# Altium PCB OpenBLC.PcbDoc
Units mm, origin at the board's own origin, x right, y up, seen from the top; angles counter-clockwise.
Board outline 47.75 x 25.5 mm, 2 copper layers (Top Layer, Bottom Layer); 40 components, 23 nets, 133 pads, 214 vias.
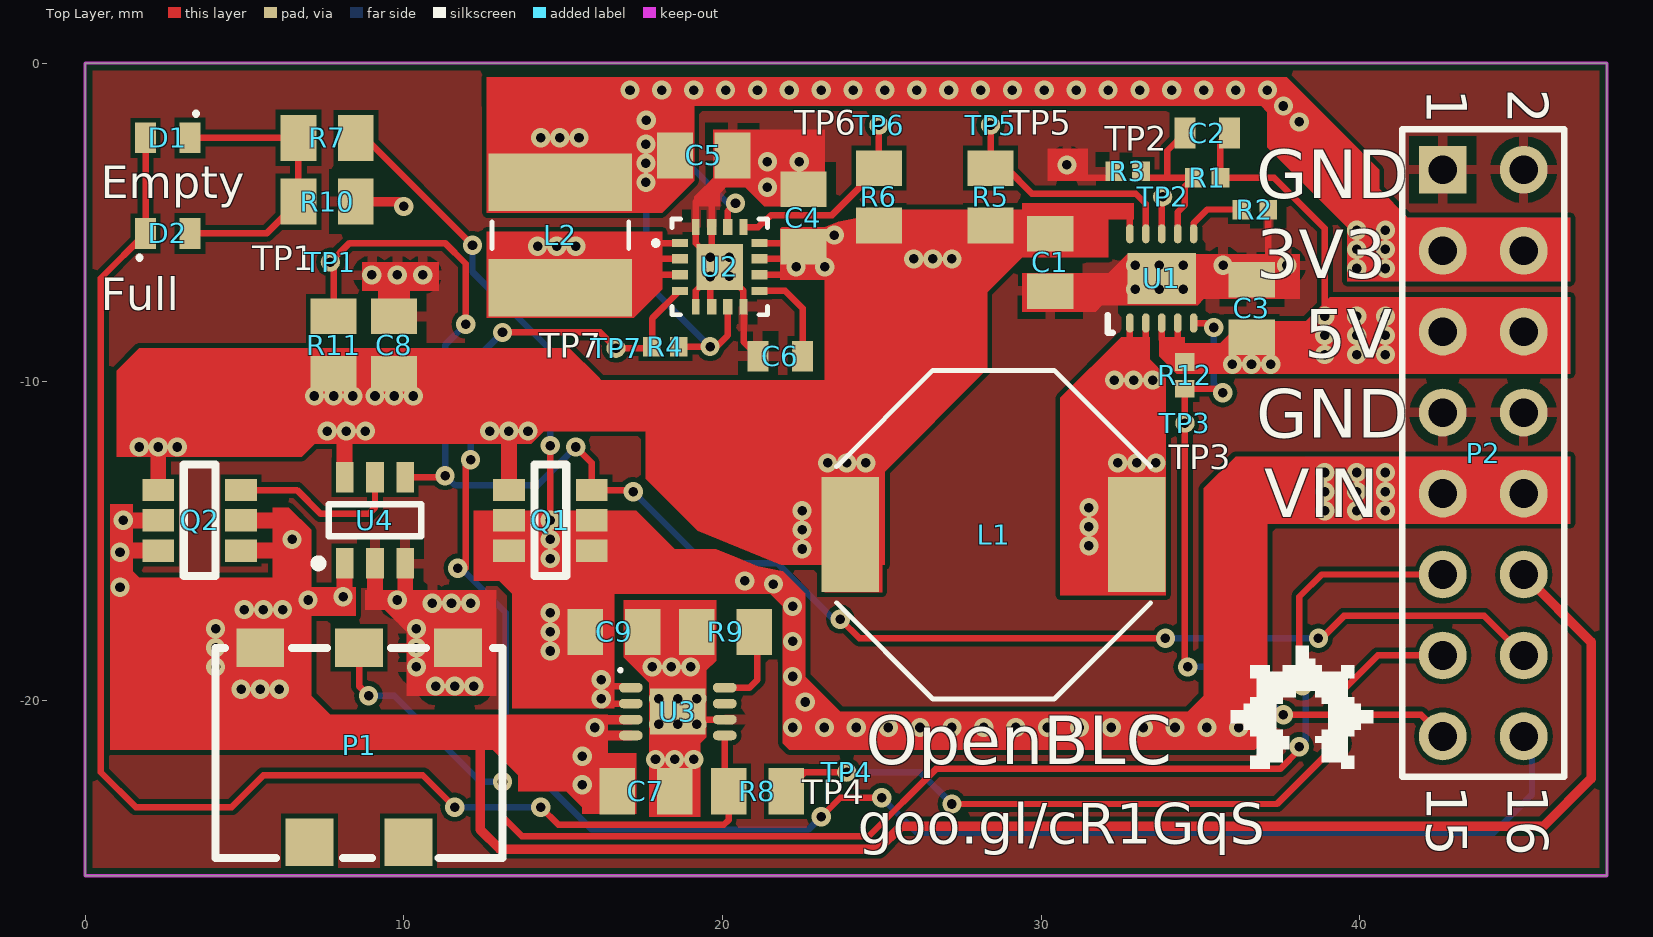
[diagram p0: Top Layer view]
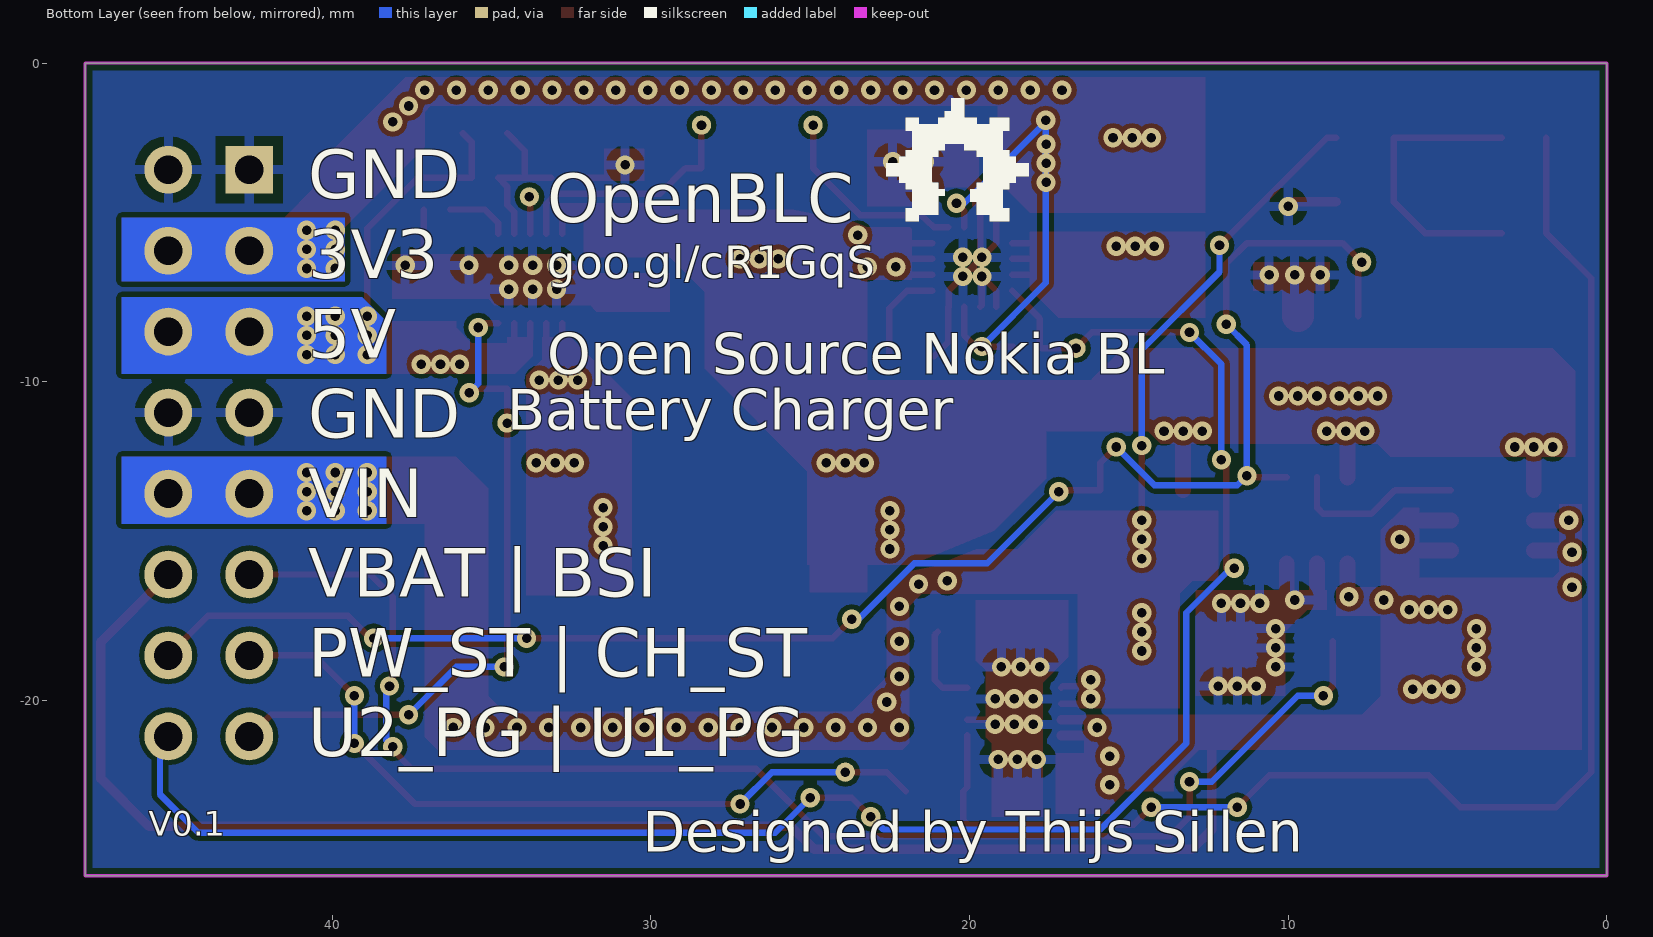
[diagram p1: Bottom Layer view, seen from below]
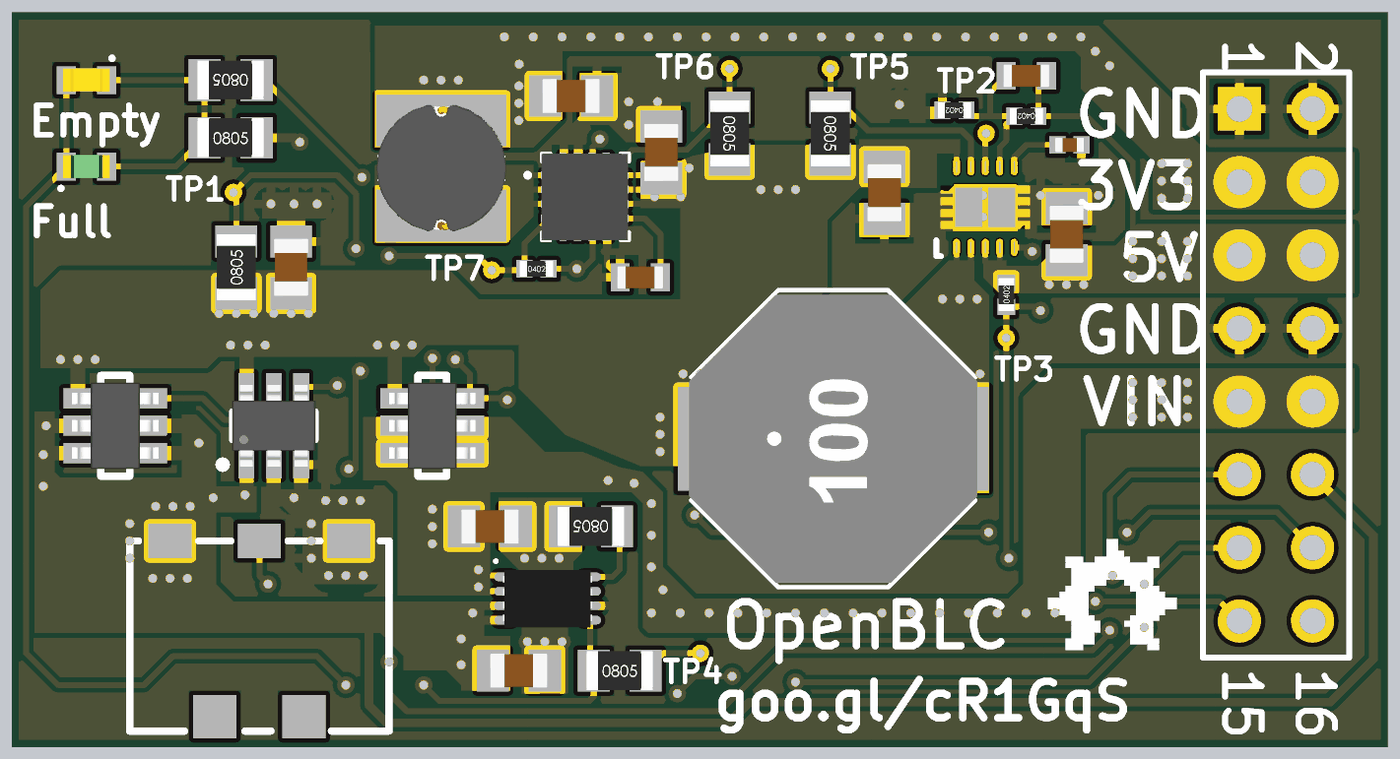
[diagram p2: 3D render of the assembled board from above, using the file's embedded part models]

## Layer stack, top to bottom
Top Solder: solder mask 0.0102, Solder Resist, Dk 3.5
Top Layer: signal copper 0.0356
Dielectric 1: dielectric 0.32, FR-4, Dk 4.8
Bottom Layer: signal copper 0.0356
Bottom Solder: solder mask 0.0102, Solder Resist, Dk 3.5

## Board outline
0,-25.5 47.75,-25.5 47.75,0 0,0

## Design rules (kind name [scope] priority, off if disabled: settings)
Clearance [All] p1: gap=0.152
ComponentClearance [All] p1 off: gap=0.254 collisioncheckmode=3 verticalgap=0.254 showdistances=FALSE
Height [All] p1 off: minheight=0 maxheight=25.4 prefheight=12.7
HoleSize [All] p1: absolutevalues=TRUE maxlimit=6.3 minlimit=0.3 maxpercent=80.000 minpercent=20.000
HoleToHoleClearance [All] p1: gap=0.45 allowstackedmicrovias=TRUE
MinimumSolderMaskSliver [All] p1: minsoldermaskwidth=0.152
PlaneConnect [All] p1: planeconnectstyle=Relief reliefexpansion=0.3 reliefentries=4 reliefconductorwidth=0.3 reliefairgap=0.3
PolygonConnect [All] p1: connectstyle=Relief reliefconductorwidth=0.3 reliefentries=4 polygonreliefangle="90 Angle" airgapwidth=0.3
RoutingCorners [All] p1: cornerstyle=45-Degree minsetback=0.152 maxsetback=0.203
RoutingVias [All] p1: holewidth=0.3 width=10 viastyle="Through Hole" minholewidth=0.3 minwidth=0.604 maxholewidth=6.3 maxwidth=0.604
SilkToSilkClearance [All] p1: silktosilkclearance=0.152
SilkToSolderMaskClearance [IsPad] p1: minsilkscreentomaskgap=0.152 clearancetoexposedcopper=TRUE
SolderMaskExpansion [All] p1: expansion=0.152
UnpouredPolygon [All] p1: allowunpoured=FALSE
Width [All] p1: maxlimit=10 minlimit=0.152 preferedwidth=0.203
20 further rules are at their usual default settings.

## Classes and differential pairs
component class OpenBLC_MCP73831: C7 C9 D1 D2 R7 R8 R9 R10 TP4 U3
component class OpenBLC_LTC4412: C8 Q1 Q2 R11 TP1 U4
component class OpenBLC_TPS62152: C4 C5 C6 L2 R4 R6 TP6 TP7 U2
component class OpenBLC_TPS61230: C1 C2 C3 L1 R1 R2 R3 R5 R12 TP2 TP3 TP5 U1
component class OpenBLC_CONNECTIONS: P1 P2

## Components (designator, comment, footprint, x,y, rotation, side; value= is the part's Value field where it differs from the comment)
C1 "C2012X5R0J226M125AC" 0805_CAP 30.283,-6.257 r270 top
C2 "C0603C180J5GACTU" 0603_CAP 35.205,-2.197 r180 top
C3 "GRM21BR61A106KE19L" 0805_CAP 36.605,-7.697 r90 top
C4 "GRM21BR61A106KE19L" 0805_CAP 22.538,-4.858 r90 top
C5 "C2012X5R0J226M125AC" 0805_CAP 19.411,-2.897 r0 top
C6 "GRM033R71C391KA01D" 0603_CAP 21.811,-9.197 r180 top
C7 "GRM21BR61A106KE19L" 0805_CAP 17.598,-22.848 r0 top
C8 "C2012X5R0J226M125AC" 0805_CAP 9.698,-8.848 r90 top
C9 "0805_CAP" 0805_CAP 16.598,-17.848 r0 top
D1 "0603LED_YE" "0603 _DIODE_YE" 2.598,-2.348 r0 top
D2 "0603LED_GR" "0603 _DIODE_GR" 2.598,-5.348 r180 top
L1 "SRU1028-1R0Y" SRU1028 28.505,-14.797 r180 top
L2 "SDR0403-2R2ML" SDR0403 14.911,-5.397 r270 top
P1 "Nokia 3pin pogo connector" Nokia_3P_batt_conn 8.598,-18.348 r0 top
P2 "Header 8X2" HDR2X8 42.598,-3.348 r270 top
Q1 "FDC638P" FDC638P 14.598,-14.348 r90 top
Q2 "FDC638P" FDC638P 3.598,-14.348 r90 top
R1 "CRCW0402402KFKED" 0402_RES 35.205,-3.597 r180 top
R2 "GRM155R71C153KA01D" 0402_CAP 36.705,-4.597 r0 top
R3 "CRCW0402100KFKEDHP" 0402_RES 32.709,-3.397 r180 top
R4 "CRCW0402100KFKEDHP" 0402_RES 18.211,-8.897 r0 top
R5 "0805_RES" 0805_RES 28.409,-4.197 r270 top
R6 "0805_RES" 0805_RES 24.909,-4.197 r270 top
R7 "0805_RES" 0805_RES 7.598,-2.348 r180 top
R8 "0805_RES" 0805_RES 21.098,-22.848 r0 top
R9 "0805_RES" 0805_RES 20.098,-17.848 r180 top
R10 "0805_RES" 0805_RES 7.598,-4.348 r0 top
R11 "0805_RES" 0805_RES 7.798,-8.848 r90 top
R12 "CRCW0402100KFKEDHP" 0402_RES 34.509,-9.797 r90 top
TP1 "U4_STAT" Via_TP 7.698,-6.248 r0 top
TP2 "U1_HYS" Via_TP 33.809,-4.197 r0 top
TP3 "U1_PG" Via_TP 34.509,-11.297 r0 top
TP4 "TESTPOINT" Via_TP 23.898,-22.248 r0 top
TP5 "U1_EN" Via_TP 28.409,-1.947 r0 top
TP6 "U2_EN" Via_TP 24.909,-1.947 r0 top
TP7 "U2_PG" Via_TP 16.659,-8.947 r0 top
U1 "TPS61230DRCT" TPS61230DRCR 33.783,-6.757 r90 top
U2 "TPS62152RGTT" TPS62152RGTR 19.911,-6.397 r0 top
U3 "MCP73831-2ATI/MC" PQFN50P300X200X5_HS-9N 18.598,-20.348 r0 top
U4 "LTC4412ES6#TRMPBF" SOT95P280X110-6N 9.098,-14.348 r90 top

## Footprints (in the part's own frame and the unit in brackets; to place one, negate y for a bottom-side part, rotate by r counter-clockwise, add the part's x,y. Pads: shape width x height; smd on the part's side, far side on the other; paste and mask are expansions set on the pad)
0402_CAP [mil]
  rect 22x24 smd: 1(-16.5,0) 2(16.5,0)
  body extent -20,-10 20,10, height 20
0402_RES [mil]
  rect 22x24 smd: 1(-16.5,0) 2(16.5,0)
  body extent -23,-11 23,11, height 16
"0603 _DIODE_GR" [mil]
  rect 26x38 smd: 1(-27.5,0) 2(27.5,0)
  silkscreen extent 35,30 35,30, body extent -32,-16 32,16, height 43
"0603 _DIODE_YE" [mil]
  rect 26x38 smd: 1(-27.5,0) 2(27.5,0)
  silkscreen extent 35,30 35,30, body extent -32,-16 32,16, height 43
0603_CAP [mil]
  rect 26x38 smd: 1(-27.5,0) 2(27.5,0)
  body extent -31,-16 31,16, height 24
0805_CAP [mil]
  rect 44x57 smd: 1(-35.5,0) 2(35.5,0)
  body extent -39,-24 39,24, height 37
0805_RES [mil]
  rect 44x57 smd: 1(-35.5,0) 2(35.5,0)
  body extent -45,-27 45,27, height 30
FDC638P [mm]
  rect 0.7x1 smd: 1(-0.95,-1.3) 1(-0.95,1.3) 1(0,1.3) 1(0,-1.3) 2(0.95,-1.3) 3(0.95,1.3)
  silkscreen extent -1.75,-0.5 1.75,0.5, body extent -1.5,-1.5 1.5,1.5, height 1.05
HDR2X8 [mm] "Connector; Header; 8x2 Position"
  rect 1.5x1.5 hole 0.9: 1(0,0)
  round 1.5 hole 0.9: 2(0,2.54) 3(2.54,0) 4(2.54,2.54) 5(5.08,0) 6(5.08,2.54) 7(7.62,0) 8(7.62,2.54) 9(10.16,0) 10(10.16,2.54) 11(12.7,0) 12(12.7,2.54) 13(15.24,0) 14(15.24,2.54) 15(17.78,0) 16(17.78,2.54)
  silkscreen extent -1.27,-1.27 19.05,3.81
Nokia_3P_batt_conn [mm]
  rect 1.5x1.2 smd: 1(-3.1,0) 2(0,0) 3(3.1,0)
  rect 1.5x1.5 smd: 4(-1.55,-6.1) 4(1.55,-6.1)
  silkscreen extent -4.5,-6.6 4.5,0, body extent -4.63,-6.73 4.63,0.13, height 4.3
PQFN50P300X200X5_HS-9N [mm] "PQFN, 8-Leads, Body 3.00x2.00mm, Pitch 0.50mm, Thermal Pad 1.75x1.45mm, IPC Medium Density"
  oval 0.75x0.3 smd: 1(-1.475,0.75) 2(-1.475,0.25) 3(-1.475,-0.25) 4(-1.475,-0.75) 5(1.475,-0.75) 6(1.475,-0.25) 7(1.475,0.25) 8(1.475,0.75)
  rect 1.75x1.45 smd: 9(0,0)
  silkscreen extent -1.85,1.25 -1.75,1.35, body extent -1.55,-1 1.55,1, height 0.85
SDR0403 [mil]
  rect 71x177 smd: 1(-65,0) 2(65,0)
  silkscreen extent -16,-84 16,84, body extent -87,-89 87,89, height 128
SOT95P280X110-6N [mm] "SOT23, 6-Leads, Body 2.90x2.80mm, Pitch 0.95mm, IPC Medium Density"
  rect 0.95x0.55 smd: 1(-1.35,0.95) 2(-1.35,0) 3(-1.35,-0.95) 4(1.35,-0.95) 5(1.35,0) 6(1.35,0.95)
  silkscreen extent -1.47,-1.45 0.5,1.9, body extent -1.41,-1.45 1.41,1.45, height 1
SRU1028 [mil]
  rect 71x142 smd: 1(-177,0) 2(177,0)
  silkscreen extent -194,-203 194,203, body extent -197,-197 197,197, height 198
TPS61230DRCR [mm]
  oval 0.6x0.24 smd paste-0.102 mask+0.051: 1(-1.4,1) 2(-1.4,0.5) 3(-1.4,0) 4(-1.4,-0.5) 5(-1.4,-1) 6(1.4,-1) 7(1.4,-0.5) 8(1.4,0) 9(1.4,0.5) 10(1.4,1)
  rect 1.6x2.15 smd paste-0.825 mask+0.051: 11(0,0)
  silkscreen extent -1.7,1.54 -1.15,1.7, body extent -1.6,-1.6 1.6,1.6, height 1
TPS62152RGTR [mm]
  rect 0.5x0.25 smd: 1(-1.25,0.75) 4(-1.25,-0.75) 9(1.25,-0.75) 12(1.25,0.75)
  rect 0.5x0.3 smd: 2(-1.25,0.25) 3(-1.25,-0.25) 10(1.25,-0.25) 11(1.25,0.25)
  rect 0.25x0.5 smd: 5(-0.75,-1.25) 8(0.75,-1.25) 13(0.75,1.25) 16(-0.75,1.25)
  rect 0.3x0.5 smd: 6(-0.25,-1.25) 7(0.25,-1.25) 14(0.25,1.25) 15(-0.25,1.25)
  rect 1.45x1.45 smd paste-0.837: 17(0,0)
  silkscreen extent -2.08,-1.5 1.5,1.5, body extent -1.55,-1.52 1.49,1.52, height 0.9
Via_TP [mm]
  round 0.604 hole 0.3: 1(0,0)

## Part data
C1 C5 C8: "CAP CER 22UF 6.3V 20% X5R 0805"
C2: "Meerlaagse keramische condensatoren MLCC - SMD/SMT 50volts 18pF C0G 5%"
C3 C4 C7: "MURATA - GRM21BR61A106KE19L - CAPACITOR, CERA, 10UF, 10%, 10V, 10%, SMD"
C6: "Meerlaagse keramische condensatoren MLCC - SMD/SMT 390pF 16 volts 10%"
L1: "Vaste smoorspoelen 1uH 30% SMD 1028"
L2: "Vaste smoorspoelen 2.2uH 20% SMD 0403"
P1: library part Nokia_3PIN_BATT_CONTACT
P2: "Header, 8-Pin, Dual row"
Q1 Q2: "MOSFET SSOT-6 P-CH -20V"
R1: "VISHAY DRALORIC - CRCW0402402KFKED - RESISTOR, 0402, 402K, 1%"
R2: "Meerlaagse keramische condensatoren MLCC - SMD/SMT 0402 0.015uF 16volts X7R 10%"
R3 R4 R12: "VISHAY DRALORIC - CRCW0402100KFKEDHP - RESISTOR, POWER, 100K, 0.125W, 1%"
TP1 TP2 TP3 TP5 TP6 TP7: library part TESTPOINT, "TESTPOINT SCOPE GRABBER"
TP4: "TESTPOINT SCOPE GRABBER"
U3: "Batterijbeheer Li-Ion/Li-Poly Charg Mgnt 4.2V Vreg out"
U4: "IC OR CTRLR SRC SELECT TSOT23-6"

## Via types
v1: diameter 0.604, hole 0.3, Top Layer to Bottom Layer, tented both sides, 214 vias

## Nets (pads, with @x,y where several pads share a name; then routed paths per layer and width w, separated by ;. In a path a pad name is that pad's centre, name@x,y a point inside that pad or via, vN(x,y) a via of type N, cw(c..) or ccw(c..) an arc to the next point about the centre after c; other vN are vias at no path point)
3.3VDC: C5.1 L2.1 P2.3 P2.4 R4.2 U2.7 U2.14 | length 15.2
  Top Layer w0.203: R4.2 v1(19.611,-8.897) 19.811,-8.897 20.161,-8.547 U2.7 ; U2.14 20.161,-4.646 20.257,-4.55 v1(20.409,-4.398)
  Bottom Layer w0.203: v1(17.611,-1.797) v1@17.611,-1.847 ; v1(19.611,-8.897) 17.611,-6.897 v1@17.611,-1.847 ; v1(20.409,-4.398) 20.161,-4.398 v1@17.611,-1.847
  other v1: 39.898,-6.448 40.798,-6.448 39.898,-5.848 40.798,-5.848 39.898,-5.248 40.798,-5.248 17.598,-3.748 17.598,-3.148 17.598,-2.548 14.298,-2.348 14.898,-2.348 15.498,-2.348 38.098,-1.848 37.598,-1.348 17.098,-0.848 18.098,-0.848 19.098,-0.848 20.098,-0.848 21.098,-0.848 22.098,-0.848 23.098,-0.848 24.098,-0.848 25.098,-0.848 26.098,-0.848 27.098,-0.848 28.098,-0.848 29.098,-0.848 30.098,-0.848 31.098,-0.848 32.098,-0.848 33.098,-0.848 34.098,-0.848 35.098,-0.848 36.098,-0.848 37.098,-0.848
5VDC: C2.1 C3.1 P2.5 P2.6 R1.1 R12.2 U1.3 U1.4 | length 11
  Top Layer w0.203: U1.3 33.783,-8.671 33.909,-8.797 ; U1.4 34.283,-8.871 34.309,-8.897 ; C2.1 35.624,-2.477 R1.1 37.305,-3.597 38.505,-4.797 38.898,-5.19 v1(38.898,-7.948) ; C3.1@36.605,-8.396 37.907,-8.396
  other v1: 35.998,-9.448 36.598,-9.448 37.198,-9.448 38.898,-9.148 39.898,-9.148 40.798,-9.148 38.898,-8.548 39.898,-8.548 40.798,-8.548 39.898,-7.948 40.798,-7.948
GND: C1.2 C3.2 C4.2 C5.2 C6.2 C7.2 C8.2 C9.2 P1.3 P2.1 P2.2 P2.7 P2.8 R2.2 R3.2 R9.2 R10.2 U1.11 U2.5 U2.6 U2.8 U2.15 U2.16 U2.17 U3.6 U3.9 U4.2 U4.3 | length 28.8
  Top Layer w0.203: P1.3 P1.3@11.798,-18.248 ; C9.2 18.598,-18.946 U3.9 ; C7.2 18.499,-20.446 U3.9 ; U2.5 19.165,-7.643 19.165,-7.143 U2.17 ; R9.2 19.196,-19.749 U3.9 ; 19.309,-4.197 19.161,-4.346 U2.16 19.165,-5.151 19.165,-5.651 U2.17@19.661,-6.147 ; 19.609,-4.297 19.661,-4.349 U2.15 U2.17@19.661,-6.147 ; v1(19.611,-6.697) 19.611,-7.597 U2.6 ; U3.6 18.848,-20.598 U3.9 ; C6.2 20.661,-8.746 U2.8 20.657,-7.643 20.657,-7.143 U2.17 ; v1@31.105,-3.197 v1(30.805,-3.197) 31.205,-3.597 R3.2@32.286,-3.597 ; C3.2@37.105,-6.297 37.124,-6.278 R2.2 ; U2.17@19.661,-6.147 U2.17
  Top Layer w0.3: R10.2 9.848,-4.348 v1(10,-4.5)
  Top Layer w0.5: U4.2 9.098,-16.648 9.298,-16.848 ; v1@9.998,-16.948 10.048,-16.898 U4.3
  Top Layer w1: C8.2 9.698,-7.148
  other v1: 17.898,-21.848 18.498,-21.848 19.098,-21.848 17.998,-20.748 18.598,-20.748 19.198,-20.748 17.998,-19.948 18.598,-19.948 19.198,-19.948 10.998,-19.548 11.598,-19.548 12.198,-19.548 10.398,-18.948 17.798,-18.948 18.398,-18.948 18.998,-18.948 10.398,-18.348 10.398,-17.748 10.898,-16.948 11.498,-16.948 12.098,-16.948 9.798,-16.848 32.955,-7.097 33.705,-7.097 34.455,-7.097 20.209,-6.696 8.998,-6.648 9.798,-6.648 10.598,-6.648 32.955,-6.347 33.705,-6.347 34.455,-6.347 35.705,-6.347 37.705,-6.347 19.609,-6.097 20.209,-6.097 21.411,-3.897 21.411,-3.097 22.411,-3.097
NetC2_2: C2.2 R1.2 R3.1 U1.7 | length 5.3
  Top Layer w0.2: R3.1@33.124,-3.597 33.709,-3.597 ; U1.7 34.283,-4.675
  Top Layer w0.203: 33.709,-3.597 33.955,-3.597 ; 34.283,-4.675 34.509,-4.448 34.509,-3.874 R1.2 33.955,-3.597 ; C2.2 33.955,-2.749 33.955,-3.597
NetC6_1: C6.1 U2.9 | length 3.1
  Top Layer w0.203: U2.9 21.161,-7.151 21.965,-7.151 22.511,-7.697 22.511,-9.196 C6.1
NetD1_1: D1.1 D2.2 R8.1 U3.5 | length 44.5
  Top Layer w0.203: D1.1 D2.2 0.498,-6.749 0.498,-22.248 1.598,-23.348 4.598,-23.348 5.598,-22.348 10.598,-22.348 v1(11.598,-23.348) ; v1(14.298,-23.348) 14.852,-23.902 20.044,-23.902 20.196,-23.749 R8.1 20.073,-22.724 U3.5
  Bottom Layer w0.203: v1(11.598,-23.348) v1(14.298,-23.348)
NetD1_2: D1.2 D2.1 R7.2 R10.1 | length 9.2
  Top Layer w0.203: D2.1 5.696,-5.348 R10.1 R7.2 D1.2
NetL1_1: L1.1 U1.1 U1.2 | length 1.3
  Top Layer w0.203: U1.1 32.783,-8.771 32.809,-8.797 ; 33.209,-8.797 33.283,-8.724 U1.2
  other v1: 31.498,-15.148 31.498,-14.548 31.498,-13.948 32.398,-12.548 32.998,-12.548 33.598,-12.548 32.298,-9.948 32.898,-9.948 33.498,-9.948
NetL2_2: L2.2 U2.1 U2.2 U2.3 | length 10.5
  Top Layer w0.203: L2.2 L2.2@15.312,-6.647 ; U2.3 L2.2@15.312,-6.647 ; U2.2 L2.2@15.812,-6.147 ; U2.1 16.312,-5.647 L2.2@15.812,-6.147 ; L2.2@15.312,-6.647 L2.2@15.812,-6.147
  other v1: 14.198,-5.748 14.798,-5.748 15.398,-5.748
NetP1_2: P1.2 P2.11 | length 44.4
  Top Layer w0.203: P1.2@8.598,-18.148 P1.2 8.598,-19.548 v1(8.898,-19.848) ; v1(13.098,-22.548) 13.098,-23.648 13.707,-24.257 24.588,-24.257 26.698,-22.148 37.498,-22.148 38.098,-21.548 v1(38.098,-21.448) ; v1(38.197,-19.548) 38.098,-19.448 38.098,-16.748 38.798,-16.048 P2.11
  Bottom Layer w0.203: v1(8.898,-19.848) 9.698,-19.848 12.398,-22.548 v1(13.098,-22.548) ; v1(38.098,-21.448) 38.298,-21.248 38.298,-19.648 v1(38.197,-19.548)
NetP2_13: P2.13 R8.2 TP4.1 | length 24.1
  Top Layer w0.203: R8.2 22.599,-22.248 TP4.1 ; v1(27.198,-23.248) 37.398,-23.248 v1(39.298,-21.348) ; v1(39.298,-19.848) 40.558,-18.588 P2.13
  Bottom Layer w0.203: TP4.1 26.198,-22.248 v1(27.198,-23.248) ; v1(39.298,-21.348) v1(39.298,-19.848)
NetP2_14: P2.14 Q1.2 R11.2 TP1.1 U4.4 | length 53.1
  Top Layer w0.203: R11.2 7.798,-6.348 TP1.1 8.298,-5.648 11.298,-5.648 11.948,-6.298 v1(11.948,-8.198) ; U4.4 11.248,-12.998 v1(11.298,-12.948) ; v1(15.398,-12.048) 15.898,-12.548 Q1.2 17.148,-13.398 v1(17.198,-13.448) ; v1(23.698,-17.448) 24.298,-18.048 v1(33.898,-18.048) ; v1(38.697,-18.048) 38.697,-18.148 39.498,-17.348 43.898,-17.348 P2.14
  Bottom Layer w0.203: v1(11.948,-8.198) 11.298,-8.848 v1(11.298,-12.948) 11.598,-13.248 14.198,-13.248 v1(15.398,-12.048) ; v1(17.198,-13.448) 19.442,-15.692 21.728,-15.692 23.484,-17.448 v1(23.698,-17.448) ; v1(33.898,-18.048) v1(38.697,-18.048)
NetP2_15: P2.15 R12.1 TP3.1 U1.5 | length 21.5
  Top Layer w0.203: v1(34.598,-18.948) 34.509,-18.859 TP3.1 R12.1 35.567,-10.217 v1(35.698,-10.348) ; U1.5 v1@35.169,-8.157 ; v1(37.598,-20.448) 41.918,-20.448 P2.15
  Bottom Layer w0.203: v1(34.598,-18.948) 36.098,-18.948 v1(37.598,-20.448) ; v1(35.409,-8.298) 35.409,-10.059 v1(35.698,-10.348)
NetP2_16: P2.16 R4.1 TP7.1 U2.4 | length 57.9
  Top Layer w0.203: v1(11.697,-15.848) 11.943,-15.848 11.944,-12.602 v1(12.098,-12.448) ; v1(13.098,-8.452) 13.102,-8.448 16.159,-8.448 TP7.1 17.742,-8.947 R4.1 17.792,-8.017 U2.4 ; v1(23.097,-23.648) 23.697,-23.048 v1(24.998,-23.048)
  Bottom Layer w0.203: v1(11.697,-15.848) 11.797,-15.948 11.898,-15.948 13.198,-17.248 13.198,-21.348 15.898,-24.048 22.697,-24.048 v1(23.097,-23.648) ; v1(12.098,-12.448) 12.098,-9.452 v1(13.098,-8.452) ; v1(24.998,-23.048) 26.098,-24.148 44.198,-24.148 45.398,-22.948 45.398,-21.388 P2.16
NetQ2_2: Q2.2 U4.5 | length 5.5
  Top Layer w0.203: Q2.2 6.648,-13.398 7.398,-14.148 8.898,-14.148 9.098,-13.948 U4.5
NetR2_1: R2.1 U1.6 | length 2
  Top Layer w0.2: U1.6 34.783,-5.02 35.205,-4.597 R2.1
NetR5_1: R5.1 TP5.1 U1.9 | length 7.6
  Top Layer w0.203: TP5.1 R5.1 28.908,-3.296 29.709,-4.097 32.969,-4.097 33.283,-4.412 U1.9
NetR6_1: R6.1 TP6.1 U2.13 | length 6.4
  Top Layer w0.203: U2.13 21.121,-5.147 21.534,-4.769 23.436,-4.769 R6.1 TP6.1
NetR9_1: R9.1 U3.8 | length 2.7
  Top Layer w0.203: U3.8 20.848,-19.598 21.098,-19.348 21.098,-17.946 R9.1
NetTP2_1: TP2.1 U1.8 | length 1.2
  Top Layer w0.203: U1.8 33.783,-4.224 TP2.1
VBAT: C7.1 P1.1 P2.12 Q2.1 U3.3 U3.4 U4.1 | length 56.5
  Top Layer w0.203: C7.1@16.498,-22.649 C7.1
  Top Layer w0.3: 12.398,-21.248 12.398,-24.048 13.011,-24.661 24.884,-24.661 25.598,-23.948 45.75,-23.948 47.25,-22.448 47.25,-18.16 P2.12 ; 15.498,-21.148 15.548,-21.098 U3.4 ; 15.698,-20.648 15.748,-20.598 U3.3
  Top Layer w0.5: v1@1.102,-15.348 1.152,-15.298 Q2.1@2.298,-15.298 ; v1(1.198,-14.348) Q2.1@2.298,-14.348 ; Q2.1@4.898,-15.298 6.448,-15.298 ; Q2.1@4.898,-14.348 6.198,-14.348 v1@6.498,-14.648 ; v1@6.498,-15.248 6.448,-15.298 ; 6.847,-15.698 6.448,-15.298 ; v1@8.148,-16.498 U4.1
  other v1: 15.598,-22.648 15.598,-21.748 15.998,-20.848 4.898,-19.648 5.498,-19.648 6.098,-19.648 4.098,-18.948 4.098,-18.348 4.098,-17.748 4.998,-17.148 5.598,-17.148 6.198,-17.148 6.998,-16.848 8.098,-16.748 1.098,-16.448 1.098,-15.348 6.498,-14.948
VIN: C9.1 P2.9 P2.10 Q1.1 R7.1 U3.1 U3.2 | length 25.6
  Top Layer w0.203: R7.1 8.784,-2.348 v1(12.156,-5.72) ; Q1.1@13.298,-15.298 Q1.1@13.298,-14.348 ; 13.998,-17.448 15.296,-17.448 C9.1 ; v1(14.598,-14.348) 14.598,-12.002 v1(14.6,-12.002) v1(14.6,-12.002) ; Q1.1@15.898,-14.348 15.898,-15.298 15.898,-17.646 C9.1 ; U3.2 16.448,-20.098 15.898,-19.548 ; U3.1 17.073,-19.548 15.898,-19.548 ; C9.1 15.696,-19.346 15.898,-19.548
  Bottom Layer w0.203: v1(12.156,-5.72) 12.156,-6.556 14.6,-9 v1(14.6,-12.002)
  other v1: 22.198,-20.848 23.198,-20.848 24.198,-20.848 25.198,-20.848 26.198,-20.848 27.198,-20.848 28.198,-20.848 29.198,-20.848 30.198,-20.848 31.198,-20.848 32.198,-20.848 33.198,-20.848 34.198,-20.848 35.198,-20.848 36.198,-20.848 22.598,-20.048 16.198,-19.948 16.198,-19.348 22.198,-19.248 14.598,-18.448 22.198,-18.148 14.598,-17.848 14.598,-17.248 22.198,-17.048 21.598,-16.348 20.698,-16.248 14.598,-15.548 14.598,-14.948 38.898,-14.048 39.898,-14.048 40.798,-14.048 38.898,-13.448 39.898,-13.448 40.798,-13.448 38.898,-12.848 39.898,-12.848 40.798,-12.848
VSWO: C1.1 C4.1 C8.1 L1.2 Q1.3 Q2.3 R5.2 R6.2 R11.1 U1.10 U2.10 U2.11 U2.12 U4.6 | length 14.9
  Top Layer w0.2: C1.1 31.118,-4.52 ; U1.10 32.783,-4.52
  Top Layer w0.203: U2.10 22.161,-6.647 22.538,-6.27 22.538,-5.556 22.269,-5.556 C4.1@22.011,-5.297 ; U2.11 21.946,-6.147 22.446,-5.647 U2.12 ; 31.118,-4.52 32.783,-4.52
  Top Layer w0.5: Q2.3 v1(2.298,-12.048) ; U4.6 8.148,-11.298 v1@8.198,-11.248 ; 13.198,-11.048 13.298,-11.148 Q1.3
  other v1: 22.498,-15.248 22.498,-14.648 22.498,-14.048 23.298,-12.548 23.898,-12.548 24.498,-12.548 1.698,-12.048 2.898,-12.048 7.598,-11.548 8.198,-11.548 8.798,-11.548 12.698,-11.548 13.298,-11.548 13.898,-11.548 7.198,-10.448 7.798,-10.448 8.398,-10.448 9.098,-10.448 9.698,-10.448 10.298,-10.448 22.309,-6.397 23.209,-6.397 25.998,-6.148 26.598,-6.148 27.198,-6.148 23.509,-5.397
pads on no net: P1.4 U3.7

## Polygon pours and split planes (outlines as drawn)
GND on Top Layer "Top Layer-No Net" (solid, pour order 6): 47.5,-25.25 47.5,-0.25 0.25,-0.25 0.25,-25.25
GND on Bottom Layer "Top Layer-No Net" (solid, pour order 8): 47.5,-25.25 0.25,-25.25 0.25,-0.25 47.5,-0.25

## Keep-outs
Keep-Out Layer:
  the board outline again, w0.1

## Other copper
Top Layer:
  region net NetL2_2: 17.211,-7.997 18.111,-7.097 18.111,-5.297 12.611,-5.297 12.611,-7.997
  region net VSWO: 21.811,-6.797 21.811,-5.196 21.859,-5.147 23.255,-5.147 23.411,-5.303 23.411,-6.797
  region net GND: 31.455,-3.697 31.455,-2.697 30.205,-2.697 30.205,-3.697
  region net GND: 29.405,-6.597 32.105,-6.597 32.705,-5.997 38.105,-5.997 38.105,-7.397 35.105,-7.397 34.905,-7.597 31.905,-7.597 31.705,-7.797 29.405,-7.797
  region net VSWO: 32.109,-6.097 32.109,-4.597 25.515,-4.597 23.627,-4.973 23.205,-5.148 23.205,-16.597 25.005,-16.597 25.005,-12.897 28.305,-9.597 28.305,-7.197 29.405,-6.097
  region net GND: 19.109,-4.497 19.109,-4.197 19.709,-3.597 19.709,-2.097 23.209,-2.097 23.209,-4.497 21.309,-4.497 20.709,-3.897 20.109,-3.897 19.909,-4.097 19.909,-4.497
  region net 3.3VDC: 12.609,-4.697 12.609,-1.197 19.109,-1.197 19.109,-3.697 18.109,-4.697
  region net NetL1_1: 33.909,-16.697 33.909,-9.797 33.409,-9.297 33.409,-8.597 32.509,-8.597 30.598,-10.509 30.598,-16.697
  region net 5VDC: 33.709,-8.597 34.509,-8.597 34.509,-8.797 35.609,-8.797 36.109,-8.297 36.109,-8.097 38.298,-8.097 38.298,-9.748 34.259,-9.748 33.709,-9.197
  region net VSWO: 29.409,-4.397 32.909,-4.397 32.909,-4.897 29.409,-4.897
  region net GND: 10.098,-19.848 10.098,-17.848 9.398,-17.148 8.798,-17.148 8.798,-16.548 12.898,-16.548 12.898,-19.848
  region net VBAT: 17.298,-23.548 17.298,-21.648 16.398,-21.648 16.398,-20.448 7.697,-20.448 7.098,-19.848 7.098,-14.648 6.398,-13.948 5.898,-13.948 5.898,-16.148 1.697,-16.148 1.498,-15.948 1.498,-13.848 0.798,-13.848 0.798,-21.548 12.797,-21.547 13.598,-22.348 13.598,-22.848 15.098,-22.848 15.598,-23.348 15.598,-23.548
  region net VBAT: 8.498,-16.448 8.498,-17.348 6.698,-17.348 6.698,-16.448
  region net GND: 8.698,-6.248 11.098,-6.248 11.098,-7.148 8.698,-7.148
  region net VSWO: 0.998,-9.648 1.698,-8.948 15.197,-8.948 16.098,-9.848 16.198,-9.948 25.098,-9.948 25.098,-15.748 21.822,-15.748 19.22,-14.67 17.597,-13.048 17.598,-11.548 7.598,-11.548 6.798,-12.348 0.998,-12.348
  region net VSWO: 7.198,-11.948 13.998,-11.948 14.498,-11.448 7.198,-11.448
  region net VIN: 16.398,-14.048 16.598,-14.248 16.598,-19.948 16.598,-20.248 16.298,-20.248 13.398,-20.248 13.397,-16.648 12.998,-16.248 12.198,-16.248 12.198,-14.048
  region net GND: 17.698,-23.648 19.298,-23.648 19.298,-21.348 19.498,-21.148 19.498,-19.048 19.798,-18.748 19.798,-16.848 16.898,-16.848 16.898,-18.648 17.698,-19.448
  region net 5VDC: 46.598,-7.348 39.047,-7.348 38.298,-8.097 38.298,-9.748 46.598,-9.748
  region net 3.3VDC: 46.598,-6.848 39.598,-6.848 39.597,-5.148 38.098,-3.648 37.098,-2.648 37.098,-1.548 36.897,-1.348 12.598,-1.348 12.598,-0.448 37.698,-0.448 40.598,-3.348 40.597,-3.948 41.498,-4.848 46.598,-4.848
  region net VIN: 46.598,-12.348 36.098,-12.348 35.098,-13.348 35.098,-19.848 34.598,-20.348 23.698,-20.348 22.598,-19.248 22.598,-16.648 21.897,-15.948 21.109,-15.791 20.28,-15.448 19.798,-15.248 18.498,-15.248 17.298,-14.048 16.398,-14.048 16.398,-16.448 16.598,-16.648 21.498,-16.648 21.898,-17.048 21.898,-21.348 22.098,-21.548 36.698,-21.548 37.098,-21.148 37.098,-14.448 46.598,-14.448
Bottom Layer:
  region net 5VDC: 46.598,-7.348 39.047,-7.348 38.298,-8.097 38.298,-9.748 46.598,-9.748
  region net 3.3VDC: 46.598,-4.848 39.598,-4.848 39.598,-6.848 46.598,-6.848
  region net VIN: 46.598,-14.448 46.598,-12.348 38.298,-12.348 38.298,-14.448

## Silkscreen, mask and mechanical layers (free items; w line width, h text height)
Top Overlay:
  region: 38.392,-18.483 38.392,-18.686 38.595,-18.686 38.595,-18.889 38.798,-18.889 38.798,-19.092 39.408,-19.092 39.408,-18.889 39.814,-18.889 39.814,-19.092 39.814,-19.296 39.611,-19.296 39.611,-19.499 39.611,-19.702 39.611,-19.905 39.814,-19.905 39.814,-20.108 40.017,-20.108 40.017,-20.312 40.424,-20.312 40.424,-20.515 40.424,-20.718 40.017,-20.718 40.017,-20.921 39.814,-20.921 39.814,-21.124 39.611,-21.124 39.611,-21.328 39.611,-21.531 39.611,-21.734 39.814,-21.734 39.814,-21.937 39.814,-22.14 39.408,-22.14 39.408,-21.937 38.798,-21.937 38.798,-21.734 38.798,-21.531 38.798,-21.328 38.595,-21.328 38.595,-21.124 38.798,-21.124 38.798,-20.921 39.001,-20.921 39.001,-20.718 39.001,-20.515 39.001,-20.312 39.001,-20.108 38.798,-20.108 38.798,-19.905 38.595,-19.905 38.595,-19.702 37.985,-19.702 37.985,-19.905 37.579,-19.905 37.579,-20.108 37.376,-20.108 37.376,-20.312 37.376,-20.515 37.376,-20.718 37.376,-20.921 37.579,-20.921 37.579,-21.124 37.782,-21.124 37.782,-21.328 37.782,-21.531 37.579,-21.531 37.579,-21.734 37.579,-21.937 37.172,-21.937 37.172,-22.14 36.563,-22.14 36.563,-21.937 36.563,-21.734 36.766,-21.734 36.766,-21.531 36.766,-21.328 36.766,-21.124 36.563,-21.124 36.563,-20.921 36.36,-20.921 36.36,-20.718 35.953,-20.718 35.953,-20.515 35.953,-20.312 36.36,-20.312 36.36,-20.108 36.563,-20.108 36.563,-19.905 36.766,-19.905 36.766,-19.702 36.766,-19.499 36.766,-19.296 36.563,-19.296 36.563,-19.092 36.563,-18.889 37.172,-18.889 37.172,-19.092 37.579,-19.092 37.579,-18.889 37.985,-18.889 37.985,-18.686 37.985,-18.483 37.985,-18.28 38.392,-18.28
  text "TP6" at 22.25,-2.25 h0.76
  text "TP5" at 29,-2.25 h0.76
  text "TP2" at 32,-2.75 h0.76
  text "Empty" at 0.5,-4.25 h1.02
  text "GND" at 36.75,-4.25 h1.52
  text "TP1" at 5.25,-6.5 h0.76
  text "3V3" at 36.75,-6.75 h1.52
  text "Full" at 0.5,-7.75 h1.02
  text "TP7" at 14.25,-9.25 h0.76
  text "5V" at 38.25,-9.25 h1.52
  text "GND" at 36.75,-11.75 h1.52
  text "TP3" at 34,-12.75 h0.76
  text "VIN" at 37,-14.25 h1.52
  text "OpenBLC" at 24.5,-22 h1.52
  text "TP4" at 22.5,-23.25 h0.76
  text "goo.gl/cR1GqS" at 24.25,-24.5 h1.27
Bottom Overlay:
  region: 20.579,-1.312 20.579,-1.515 20.782,-1.515 20.782,-1.718 20.985,-1.718 20.985,-1.921 21.595,-1.921 21.595,-1.718 22.001,-1.718 22.001,-1.921 22.001,-2.124 21.798,-2.124 21.798,-2.328 21.798,-2.531 21.798,-2.734 22.001,-2.734 22.001,-2.937 22.204,-2.937 22.204,-3.14 22.611,-3.14 22.611,-3.344 22.611,-3.547 22.204,-3.547 22.204,-3.75 22.001,-3.75 22.001,-3.953 21.798,-3.953 21.798,-4.156 21.798,-4.36 21.798,-4.563 22.001,-4.563 22.001,-4.766 22.001,-4.969 21.595,-4.969 21.595,-4.766 20.985,-4.766 20.985,-4.563 20.985,-4.36 20.985,-4.156 20.782,-4.156 20.782,-3.953 20.985,-3.953 20.985,-3.75 21.188,-3.75 21.188,-3.547 21.188,-3.344 21.188,-3.14 21.188,-2.937 20.985,-2.937 20.985,-2.734 20.782,-2.734 20.782,-2.531 20.172,-2.531 20.172,-2.734 19.766,-2.734 19.766,-2.937 19.563,-2.937 19.563,-3.14 19.563,-3.344 19.563,-3.547 19.563,-3.75 19.766,-3.75 19.766,-3.953 19.969,-3.953 19.969,-4.156 19.969,-4.36 19.766,-4.36 19.766,-4.563 19.766,-4.766 19.36,-4.766 19.36,-4.969 18.75,-4.969 18.75,-4.766 18.75,-4.563 18.953,-4.563 18.953,-4.36 18.953,-4.156 18.953,-3.953 18.75,-3.953 18.75,-3.75 18.547,-3.75 18.547,-3.547 18.14,-3.547 18.14,-3.344 18.14,-3.14 18.547,-3.14 18.547,-2.937 18.75,-2.937 18.75,-2.734 18.953,-2.734 18.953,-2.531 18.953,-2.328 18.953,-2.124 18.75,-2.124 18.75,-1.921 18.75,-1.718 19.36,-1.718 19.36,-1.921 19.766,-1.921 19.766,-1.718 20.172,-1.718 20.172,-1.515 20.172,-1.312 20.172,-1.108 20.579,-1.108
  text "GND" at 40.75,-4.25 h1.52
  text "OpenBLC" at 33.25,-5 h1.52
  text "goo.gl/cR1GqS" at 33.25,-6.75 h1.02
  text "3V3" at 40.75,-6.75 h1.52
  text "5V" at 40.75,-9.25 h1.52
  text "Open Source Nokia BL" at 33.25,-9.75 h1.27
  text "Battery Charger" at 34.5,-11.5 h1.27
  text "GND" at 40.75,-11.75 h1.52
  text "VIN" at 40.75,-14.25 h1.52
  text "VBAT | BSI" at 40.75,-16.75 h1.52
  text "PW_ST | CH_ST" at 40.75,-19.25 h1.52
  text "U2_PG | U1_PG" at 40.75,-21.75 h1.52
  text "V0.1" at 45.75,-24.25 h0.76
  text "Designed by Thijs Sillen" at 30.25,-24.75 h1.27

## Text inside footprints (layer, text, board x,y; h text height)
P2: Top Overlay "16" at 44.63,-22.652 h1.27 r270; Top Overlay "15" at 42.09,-22.652 h1.27 r270; Top Overlay "1" at 42.09,-0.808 h1.27 r270; Top Overlay "2" at 44.63,-0.808 h1.27 r270